# Altium PCB Homodyne_detector.PcbDoc (part 2 of 2)
Units mm, origin at the board's own origin, x right, y up, seen from the top; angles counter-clockwise.
Board outline 120.15 x 50.65 mm, 2 copper layers (TOP, BOT), stack 1.57 mm thick; 115 components, 51 nets, 316 pads, 138 vias.
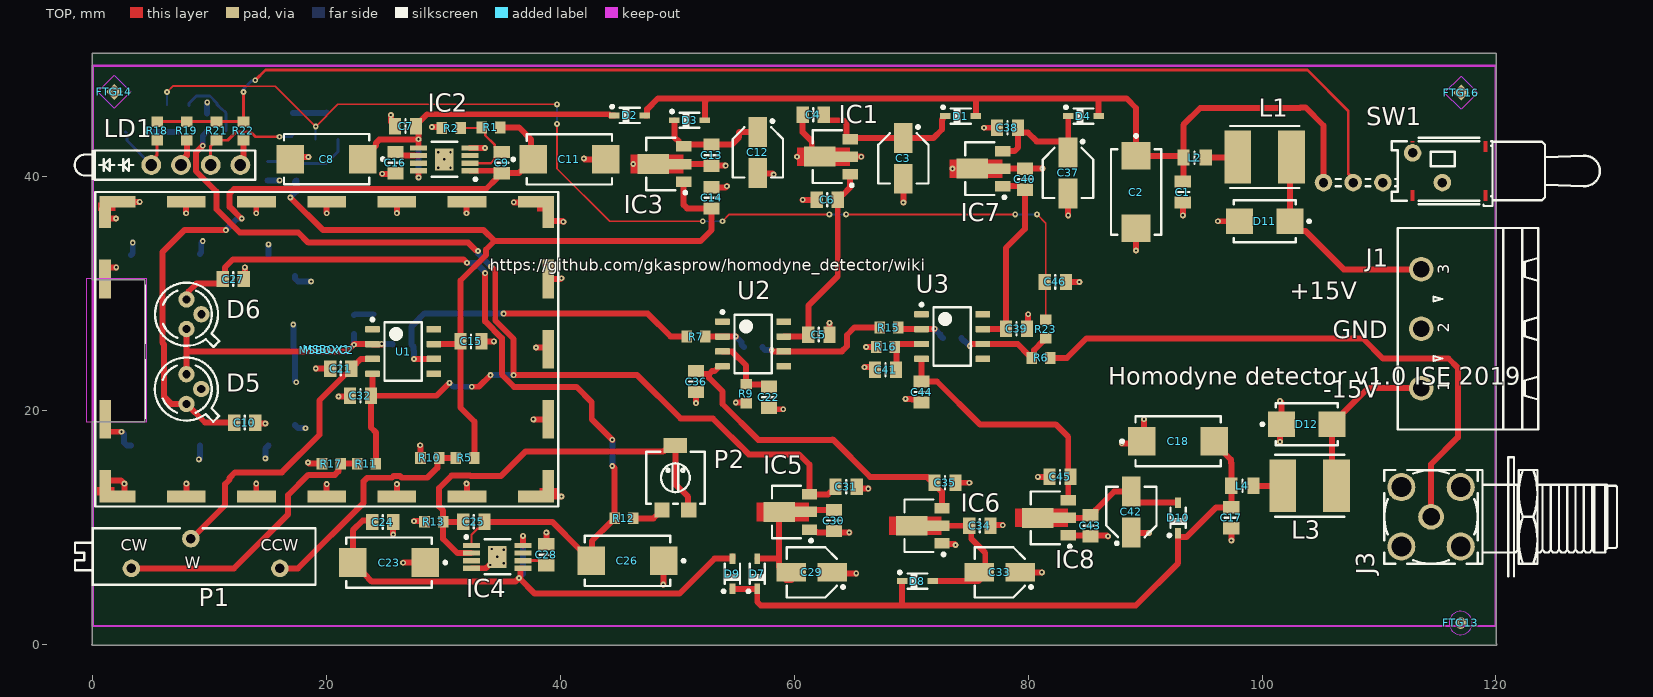
[diagram p0: TOP view]

## Via types
v1: diameter 0.5, hole 0.2, TOP to BOT, tented both sides, 138 vias

## Nets (pads, with @x,y where several pads share a name; then routed paths per layer and width w, separated by ;. In a path a pad name is that pad's centre, name@x,y a point inside that pad or via, vN(x,y) a via of type N, cw(c..) or ccw(c..) an arc to the next point about the centre after c; other vN are vias at no path point) (continued)
N5V0B: (continued)
  TOP w0.508: C36.1 51.763,23.386 52.034,23.115 52.694,23.115 ; U2.4 53.5,23.792 53.479,23.771 53.479,23.684 53.181,23.386 52.965,23.386 52.694,23.115 ; IC6.3 72.629,13.027 71.329,14.327 66.475,14.327 63.269,17.533 63.236,17.5 56.911,17.5 53.85,20.561 53.85,21.642 52.694,22.798 52.694,23.115
N5V0C: C44.1 C45.1 IC8.3 U3.4 | length 21.9
  TOP w0.508: U3.4 C44.1 72.202,22.486 75.861,18.827 82.348,18.827 83.425,17.75 IC8.3
N15V0: C17.2 C18.2 D7.1 D8.1 D9.1 D10.1 L4.1 | length 56.6
  TOP w0.508: D9.1 D7.1 56.825,3.625 57.122,3.327 69.221,3.327 ; D8.1 69.221,3.327 ; D10.1 D10.1@92.825,9.247 ; C18.2@96.375,16.727 96.425,16.727 97.346,15.806 97.346,15.537 97.375,15.508 L4.1 C17.2 96.07,11.727 93.52,9.177 92.895,9.177 D10.1@92.825,9.247 ; 69.221,3.327 89.196,3.327 92.825,6.956 D10.1@92.825,9.247
NetC3_1: C3.1 C4.1 D1.1 IC1.3 | length 13.1
  TOP w0.508: C4.1 62.514,45.128 62.785,44.857 62.96,44.857 62.989,44.828 64.177,44.828 64.475,44.531 IC1.3@64.475,43.411 ; IC1.3 64.884,43.325 C3.1 71.911,43.325 72.625,44.038 72.625,44.891 72.729,44.995 72.729,45.187 72.733,45.191 D1.1
NetC7_1: C7.1 C8.1 D2.1 IC2.5 IC2.8 | length 28.5
  TOP w0.508: C8.1 23.1,41.556 24.2,42.656 24.2,42.87 24.498,43.168 27.819,43.168 v1(27.859,43.207) ; v1(27.864,39.936) IC2.8 ; 27.864,42.704 27.859,42.709 v1(27.859,43.207) ; D2.1 44.611,45.245 44.27,45.245 44.174,45.342 28.576,45.342 27.859,44.625 v1(27.859,43.207)
  BOT w0.508: v1(27.859,43.207) 27.864,43.203 v1(27.864,39.936)
NetC9_1: C9.1 IC2.2 R1.1 R2.2 | length 7.8
  TOP w0.203: R2.2 33.198,44.168 R1.1 33.546,43.919 33.546,43.541 34.383,42.704 34.383,42.529 C9.1@34.807,42.106 ; IC2.2 34.036,41.16 34.383,41.507 34.383,41.682 C9.1@34.807,42.106 ; C9.1 C9.1@34.807,42.106
NetC9_2: C9.2 C10.1 C11.1 D5.1 IC2.1 R1.2 | length 64.8
  TOP w0.508: v1(11.375,35.433) 7.823,35.433 5.944,33.553 5.944,25.806 6.096,25.654 6.096,21.184 6.709,20.571 D5.1 9.597,18.974 C10.1 ; v1@12.718,36.407 11.7,37.425 11.7,38.578 12.078,38.956 33.632,38.956 34.536,39.86 34.536,40.035 34.807,40.306 C9.2 ; IC2.1 34.777,40.51 C9.2 ; R1.2 36.45,44.218 37.493,43.175 37.493,41.642 C11.1 37.65,41.435 36.729,40.514 36.652,40.514 36.444,40.306 C9.2
  BOT w0.508: v1(11.375,35.433) 12.366,36.424 v1(12.735,36.424)
NetC12_1: C12.1 C13.1 D3.1 IC3.3 | length 9.8
  TOP w0.508: D3.1 49.739,43.384 50.14,42.984 50.14,42.784 50.336,42.588 IC3.3 50.698,42.75 C13.1 54.644,42.75 55.279,43.384 55.279,43.792 55.315,43.828 C12.1
NetC16_2: C16.2 IC2.6 | length 2.1
  TOP w0.508: C16.2 26.056,42.106 26.351,41.81 IC2.6
NetC19_1: C19.1 D5.3 D6.1 R3.1 U1.2 | length 22.8
  TOP w0.508: D5.3 8.012,23.123 8.012,25.046 ; D6.1 8.012,25.046 ; v1@22.332,25.648 21.731,25.046 8.012,25.046 ; v1@22.371,25.687 U1.2 23.936,25.666 24.677,25.666 24.714,25.629 v1@24.79,25.629
  BOT w0.508: v1(22.332,25.629) C19.1 ; v1(24.702,25.705) 24.727,25.679 25.616,25.679 R3.1
NetC19_2: C19.2 C20.1 | length 1.7
  BOT w0.508: C19.2 22.416,28.239 C20.1
NetC20_2: C20.2 R3.2 R7.2 U1.6 | length 29.4
  TOP w0.508: v1(27.471,24.417) U1.6 ; v1(35.134,28.292) 47.459,28.292 49.419,26.332 R7.2
  BOT w0.508: v1(27.471,24.417) 27.471,25.11 27.437,25.144 27.437,25.458 R3.2 27.241,27.177 27.923,27.858 27.923,27.884 28.279,28.239 C20.2 28.356,28.292 v1(35.134,28.292)
NetC21_1: C21.1 P1.2 U1.3 | length 25
  TOP w0.508: P1.2 8.439,9.04 11.3,11.901 11.3,13.707 11.7,14.107 11.7,14.25 12.162,14.712 16.161,14.712 19.38,17.931 19.38,20.872 21.654,23.146 21.829,23.146 22.1,23.417 C21.1 22.1,23.767 22.371,24.038 22.546,24.038 22.925,24.417 U1.3
NetC22_1: C22.1 R9.1 U2.3 | length 6.2
  TOP w0.508: U2.3 53.871,25.041 54.695,25.041 55.875,23.86 R9.1 57.625,22.236 C22.1
NetC23_2: C23.2 C24.2 D9.2 IC4.5 IC4.8 | length 45.8
  TOP w0.508: C24.2 23.754,10.604 23.082,10.604 22.235,9.757 C23.2 22.235,6.95 23.156,6.029 23.206,6.029 23.867,5.369 36.126,5.369 v1(36.445,5.687) ; IC4.5 36.609,6.512 36.58,6.483 36.58,5.823 v1(36.445,5.687) ; IC4.8 v1(36.793,9.287) ; D9.2@54.691,7.538 54.695,7.534 D9.2 53.177,7.342 50.181,4.346 37.786,4.346 v1(36.445,5.687)
  BOT w0.508: v1(36.445,5.687) 36.793,6.035 v1(36.793,9.287)
NetC25_1: C25.1 IC4.2 P2.1 P2.2 R13.2 | length 36.9
  TOP w0.508: C25.1 R13.2 ; IC4.2 31.173,7.812 29.965,9.019 R13.2 ; P2.1 50.912,11.566 50.912,12.618 49.825,13.706 P2.2 49.429,16.608 48.9,16.608 48.781,16.489 36.995,16.489 34.895,14.388 32.282,14.388 32.239,14.432 30.682,14.432 29.625,13.375 29.625,11.8 29.965,11.46 R13.2
NetC25_2: C25.2 C26.2 C27.2 D6.3 IC4.1 R12.2 | length 74.2
  TOP w0.2: IC4.1 32.393,9.387 32.89,9.884 33.065,9.884 33.49,10.309 C25.2
  TOP w0.508: D6.3 8.183,29.68 8.183,30.18 8.865,30.861 10.829,30.861 11.1,31.132 C27.2 11.309,31.459 11.309,32.25 11.99,32.932 31.707,32.932 v1(32,32.639) ; C25.2 39.291,10.484 41.654,8.121 41.704,8.121 42.625,7.2 C26.2 42.68,7.205 42.68,8.839 R12.2@44.379,10.538 ; v1(33.553,31.755) 33.553,27.628 34.982,26.2 34.982,23.079 36.039,22.022 41.377,22.022 42.672,20.726 42.672,19.257 v1(44.429,17.5) ; v1(44.429,15.266) 44.625,15.07 R12.2
  BOT w0.508: v1(32,32.639) 32.741,32.639 33.553,31.826 v1(33.553,31.755) ; v1(44.429,15.266) v1(44.429,17.5)
NetC28_2: C28.2 IC4.6 | length 2.2
  TOP w0.254: IC4.6 38.218,7.162 38.618,6.762 C28.2
NetC29_2: C29.2 C30.1 D7.2 IC5.2 | length 13.2
  TOP w0.508: D7.2 58.675,7.342 58.69,7.327 ; C29.2@59.769,5.496 59.294,5.496 58.748,6.042 58.748,6.517 58.69,6.575 58.69,7.327 ; C30.1 60.99,11.493 58.856,11.493 58.69,11.327 58.69,7.327
NetC33_2: C33.2 C34.1 D8.2 IC6.2 | length 14.4
  TOP w0.508: IC6.2@70.029,10.147 72.329,10.147 C34.1 75.128,9.984 75.128,9.023 76.325,7.827 76.325,6.71 76.289,6.674 76.289,5.956 75.743,5.41 75.675,5.41 D8.2
NetC37_1: C37.1 C38.1 D4.1 IC7.3 | length 11.6
  TOP w0.508: IC7.3 78.827,42.191 79.125,42.489 C38.1@79.125,44.038 ; C38.1 C38.1@79.125,44.038 ; D4.1 83.425,42.097 C37.1 83.406,42.484 82.86,43.03 80.725,43.03 79.987,43.767 79.396,43.767 C38.1@79.125,44.038
NetC41_1: C41.1 R16.1 U3.3 | length 4.1
  TOP w0.508: C41.1@68.7,23.792 68.741,23.832 68.741,25.697 U3.3
NetC42_2: C42.2 C43.1 D10.2 IC8.2 | length 13.7
  TOP w0.508: IC8.2@80.825,10.827 83.125,10.827 85.105,10.827 C43.1 85.5,11.047 85.771,11.318 85.771,11.493 87.355,13.077 C42.2 88.825,12.673 89.371,12.127 D10.2
NetC46_1: C46.1 R23.1 T2.1 T4.2 | length 96
  TOP w0.152: v1(6.34,47.25) 6.844,47.754 13.088,47.754 13.096,47.746 15.608,47.746 v1(19.063,44.291) 20.963,46.191 v1(39.7,46.191) ; v1(39.7,44.518) 39.7,40.697 44.199,36.197 v1(52.163,36.197) ; v1(53.85,36.197) 54.431,36.778 v1(62.997,36.778) ; v1(64.425,36.778) v1(78.887,36.778) ; v1(80.756,36.778) 81.5,36.034 R23.1
  BOT w0.152: T2.1 v1(6.34,47.25) ; T4.2 19.05,44.278 v1(19.063,44.291) ; v1(39.7,44.518) v1(39.7,46.191) ; v1(52.163,36.197) v1(53.85,36.197) ; v1(62.997,36.778) v1(64.425,36.778) ; v1(78.887,36.778) v1(80.756,36.778)
NetD11_1: D11.1 J1.3 L1.2 | length 18.5
  TOP w0.508: L1.2 102.375,41.541 D11.1 103.196,35.37 103.696,35.37 106.986,32.08 J1.3
NetD12_2: D12.2 J1.1 L3.2 | length 14.4
  TOP w0.508: L3.2 105.975,13.956 D12.2 106.05,18.827 106.871,19.648 106.871,19.723 109.068,21.92 J1.1
NetJ3_1: J3.1 R6.1 | length 50.3
  TOP w0.508: R6.1 83.303,24.5 84.97,26.167 108.629,26.167 110.336,24.46 115.948,24.46 116.751,23.658 116.751,17.707 114.452,15.409 J3.1
NetL1_1: L1.1 L2.2 | length 2.8
  TOP w0.508: L2.2 97.873,41.639 L1.1
NetL3_1: L3.1 L4.2 | length 2.5
  TOP w0.508: L4.2 L3.1
NetLD1_1: LD1.1 R18.2 T3.2 | length 6
  TOP w0.25: LD1.1 5,41.371 5.5,41.871 R18.2
  BOT w0.25: T3.2 2.911,43.698 2.911,43.089 LD1.1
NetLD1_2: LD1.2 R19.2 | length 2.3
  TOP w0.508: LD1.2 7.54,41.323 8.04,41.823 R19.2
NetLD1_3: LD1.3 R21.2 T5.2 | length 9.4
  TOP w0.25: LD1.3 10.08,42.618 10.205,42.743 10.205,42.793 10.53,43.118 R21.2 11.537,43.118 12.265,43.845 13.494,43.845 13.922,43.418 v1(15.965,43.418)
  BOT w0.25: v1(15.965,43.418) 16.972,43.418 T5.2
NetLD1_4: LD1.4 R22.2 | length 2.2
  TOP w0.508: LD1.4 12.62,41.323 12.879,41.582 R22.2
NetP1_1: P1.1 R5.2 R10.2 | length 20.5
  TOP w0.508: P1.1 17.551,6.5 23.167,12.116 23.167,13.956 23.465,14.254 25.583,14.254 25.718,14.388 26.282,14.388 26.417,14.254 28.615,14.254 29.463,15.101 29.463,15.789 R10.2 R5.2
NetP1_3: P1.3 R11.2 R17.2 | length 24.2
  TOP w0.508: P1.3 12.076,6.5 16.708,11.132 16.708,12.776 18.432,14.5 20.7,14.5 21.004,14.804 21.004,15.266 R17.2 R11.2
NetP2_3: P2.3 R12.1 | length 2.7
  TOP w0.508: R12.1 47.955,10.784 P2.3
NetR4_1: R4.1 R7.1 U2.2 | length 3.8
  TOP w0.508: R7.1 U2.2 v1(54.989,26.332)
  BOT w0.508: v1(54.989,26.332) 55.479,25.842 55.479,25.639 R4.1
NetR4_2: R4.2 R15.2 U2.6 | length 11.6
  TOP w0.508: v1(58.064,25.171) 58.171,25.065 59.096,25.065 U2.6 64.062,25.062 64.5,25.5 64.5,26.467 65.134,27.1 R15.2
  BOT w0.508: R4.2 57.275,25.393 57.471,25.197 58.039,25.197 v1(58.064,25.171)
NetR6_2: R6.2 R14.2 R23.2 U3.6 | length 8.7
  TOP w0.508: v1(75,25.517) 75.179,25.697 U3.6 79.103,25.697 R6.2@80.054,24.746 ; R6.2 80.496,24.696 80.496,25.163 81.254,25.921 81.254,25.971 81.45,26.167 R23.2
  BOT w0.508: R14.2 74.3,26.147 74.496,25.951 74.567,25.951 v1(75,25.517)
NetR14_1: R14.1 R15.1 U3.2 | length 4.3
  TOP w0.508: R15.1 69.025,26.967 U3.2 71.967,26.967 v1(72,27)
  BOT w0.508: v1(72,27) 72.504,26.496 72.504,26.393 R14.1
NetR18_1: R18.1 R19.1 R21.1 R22.1 SW1.2 | length 113.1
  TOP w0.25: R18.1 R19.1 R21.1 R22.1 v1(12.879,47.25) ; v1(13.89,48.25) 14.763,49.123 103.877,49.123 107.375,45.625 107.375,40.259 107.796,39.838 SW1.2
  BOT w0.25: v1(12.879,47.25) 12.879,47.5 13.582,48.202 13.842,48.202 v1(13.89,48.25)
NetR20_2: R20.2 R24.1 T2.2 | length 5.8
  BOT w0.25: T2.2 8.24,46.309 8.843,46.911 10.009,46.911 10.603,46.318 10.603,46.195 11.005,45.793 11.055,45.793 11.38,45.468 R24.1 R20.2
NetR25_1: R25.1 R26.2 T4.1 | length 7.6
  BOT w0.25: R25.1 R26.2 17.562,41.13 19.974,41.13 20.95,42.106 T4.1
NetT2_3: T2.3 T3.1 | length 2.6
  BOT w0.508: T3.1 T2.3
NetT4_3: T4.3 T5.1 | length 2.9
  BOT w0.508: T5.1 19.99,45.468 T4.3
P5V0A: C14.1 C15.1 IC3.1 R5.1 R26.1 U1.7 | length 68.8
  TOP w0.508: v1(16.896,38.229) 19.692,35.433 33.428,35.433 34.361,34.5 ; U1.7 31.217,25.687 C15.1 ; R5.1 32.625,19.069 31.448,20.246 C15.1 ; IC3.1 50.536,37.589 50.834,37.291 C14.1 52.914,35.433 51.981,34.5 34.361,34.5 ; C15.1 31.448,31.123 33.622,33.296 33.622,33.773 34.349,34.5 34.361,34.5
  BOT w0.508: v1(16.896,38.229) 17.4,38.734 R26.1 R26.1@17.27,39.562
P5V0B: C5.1 C6.1 IC1.1 U2.7 | length 17.5
  TOP w0.508: U2.7 61.028,26.332 C5.1 61.197,28.965 63.71,31.478 C6.1 63.71,38.2 63.981,38.471 64.156,38.471 64.775,39.09 IC1.1
P5V0C: C39.1 C40.1 IC7.1 U3.7 | length 16.6
  TOP w0.508: U3.7 78.067,26.967 C39.1 78.1,33.916 79.725,35.541 C40.1 79.55,38.891 79.25,39.191 IC7.1
P15V0: C1.1 C2.1 D1.2 D2.2 D3.2 D4.2 L2.1 SW1.1 | length 79.5
  TOP w0.508: D2.2 47.407,45.241 47.411,45.245 47.411,45.777 48.318,46.685 52.614,46.685 ; D3.2 52.339,46.41 52.614,46.685 ; D1.2 75.525,46.485 75.725,46.685 ; D4.2 86.025,46.585 85.925,46.685 ; C1.1 93.275,39.641 L2.1 ; SW1.1 105.256,44.385 103.71,45.931 103.29,45.931 103.237,45.878 94.712,45.878 93.275,44.441 L2.1 ; 52.614,46.685 75.725,46.685 ; 75.725,46.685 85.925,46.685 ; 85.925,46.685 88.418,46.685 89.225,45.878 C2.1 93.123,41.791 L2.1
pads on no net: FTG13.FTG2 FTG14.1 FTG16.1 IC2.3 IC2.7 IC4.3 IC4.7 SW1.3 SW1.4 U1.1 U1.5 U1.8 U2.1 U2.5 U2.8 U3.1 U3.5 U3.8

## Polygon pours and split planes (outlines as drawn)
GND on BOT "NONET_L-01_P-001" (solid, remove dead copper, pour order 0): 0,49.5 120,49.5 120,1.578 0,1.578

## Keep-outs
KeepOutLayer:
  lines w0.2: 0,1.578 0,49.5 120,49.5 120,1.578 0,1.578

## Other copper
TOP:
  rectangle net GND: 0.366,12.754 1.848,13.479
  rectangle net GND: 0.45,37.061 1.932,37.786
  rectangle net GND: 37.972,37.045 39.454,37.77
  rectangle net GND: 38.218,12.65 39.7,13.375
  rectangle net GND: 45.998,40.288 50.509,41.888
  rectangle net GND: 60.237,40.915 64.747,42.515
  rectangle net GND: 73.287,39.891 77.797,41.491
  rectangle net NetC42_2: 78.887,10.027 83.397,11.627
  rectangle net NetC33_2: 68.091,9.347 72.601,10.947
  rectangle net NetC29_2: 56.752,10.527 61.262,12.127
BOT:
  pour cut-out: 6.743,28.49 6.748,22.216 8.404,22.216 9.997,23.809 21.947,23.809 23.19,25.052 23.19,26.36 23.167,26.36 10.25,26.36 8.12,28.49
  pour cut-out: 68.1,27.75 75.085,27.75 75.5,27.335 75.5,25.276 75.288,25.064 69.176,25.064 68.1,26.14
  pour cut-out: 51.389,27.082 58.093,27.082 58.475,26.7 58.475,24.641 58.263,24.429 52.526,24.429 51.389,25.566
  pour cut-out: 21.178,29.827 28.956,29.827 28.956,24.714 21.178,24.714

## Silkscreen, mask and mechanical layers (free items; w line width, h text height)
TopOverlay:
  text "https://github.com/gkasprow/homodyne_detector/wiki" at 33.938,31.953 h1
  text "+15V" at 102.375,29.54 h1.5
  text "GND" at 106.05,26.167 h1.5
  text "Homodyne detector v1.0 ISE 2019" at 86.825,22.225 h1.5
  text "-15V" at 105.256,21.077 h1.5
Mechanical1:
  lines w0.1: 9.038,50.5 0,50.5 0,31.25 4.5,31.25 4.5,19 0,19 ; 10.51,0 107,0 ; 19.038,50 19.038,50 ; 108,50.5 120,50.5 ; 120,0 120,50.5 ; 0,14.5 0,19 ; 0,14.5 0,14.5 ; 0,14.5 0,9.5 0,0 0,19 ; 120,50.5 120,50.5
  lines w0.152: 0,0 10.51,0 ; 9.038,50.5 108,50.5 ; 107,0 112.979,0 120,0

## Text inside footprints (layer, text, board x,y; h text height)
J1: TopOverlay "1" at 116.016,21.64 h1 r90; TopOverlay "2" at 116.016,26.64 h1 r90; TopOverlay "3" at 116.016,31.64 h1 r90
P1: TopOverlay "CW" at 2.38,8.015 h1; TopOverlay "W" at 7.88,6.515 h1; TopOverlay "CCW" at 14.38,8.015 h1; Mechanical14 "CW" at 2.38,8.015 h1; Mechanical14 "W" at 7.88,6.515 h1; Mechanical14 "CCW" at 14.38,8.015 h1